# Altium PCB XEM7310_Breakout.PcbDoc (part 2 of 3)
Units mil, origin at the board's own origin, x right, y up, seen from the top; angles counter-clockwise.
Board outline 5980 x 6510 mil, 4 copper layers (Top, Ground Plane, Power Plane, Bottom), stack 61.497 mil thick; 68 components, 204 nets, 832 pads, 382 vias.
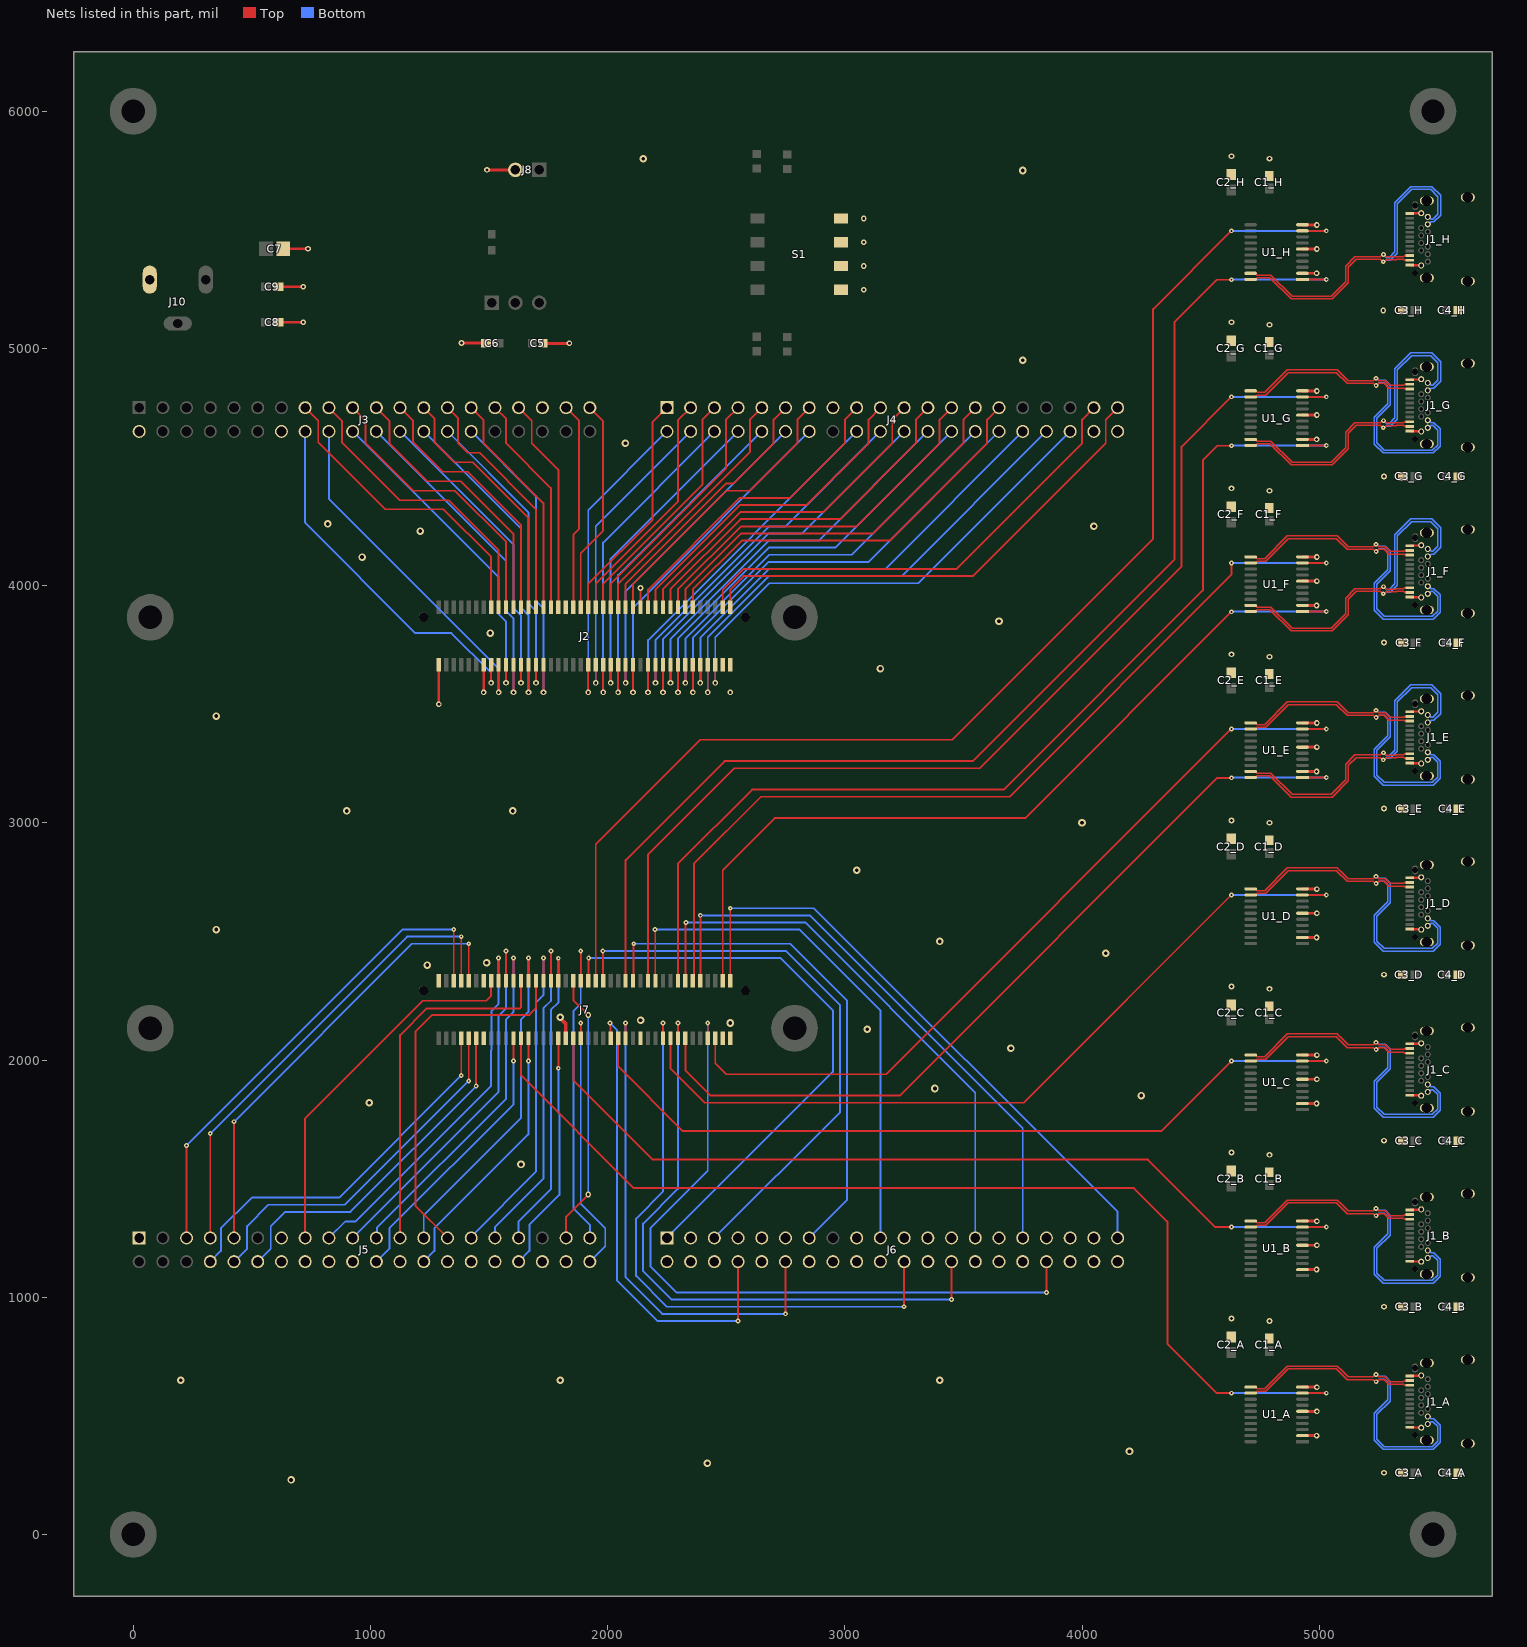
[diagram p4: the nets of this part, all layers, seen from the top]

## Via types
v1: diameter 20, hole 8, Top to Bottom, 190 vias
v2: diameter 24, hole 12, Top to Bottom, 154 vias
v3: diameter 32, hole 16, Top to Bottom, 38 vias

## Nets (pads, with @x,y where several pads share a name; then routed paths per layer and width w, separated by ;. In a path a pad name is that pad's centre, name@x,y a point inside that pad or via, vN(x,y) a via of type N, cw(c..) or ccw(c..) an arc to the next point about the centre after c; other vN are vias at no path point) (continued)
C\S\_E: J7.68 U1_E.1 | length 3536.5
  Top w8: J7.68@2327.83,2091.02 2327.83,1957.32 2435.16,1850 3230.61,1850 4570.12,3189.51 v1(4630,3189.51) ; U1_E.1@4929.27,3190.96 v1(5030,3190.96)
  Bottom w8: v1(4630,3189.51) 4630.73,3190.23 5029.27,3190.23 v1(5030,3190.96)
C\S\_E_N: J1_E.A3 J1_E.B3 U1_E.19 | length 1489
  Top w6.3: U1_E.19@4710.73,3216.55 4732.63,3216.55 4739.78,3209.4 4796.58,3209.4 4885.98,3120 5050.05,3120 5111.07,3181.02 5111.07,3246.82 5150.82,3286.57 5258.31,3286.57 5267.25,3295.5 5272.75,3295.5 5282.71,3285.55 5320.36,3285.55 5321.72,3286.91 5355.67,3286.91 5359.24,3290.47 5381.77,3290.47 J1_E.A3@5382.4,3291.1
  Bottom w6.3: v1(5270.82,3295.5) 5272.84,3295.5 5285.59,3282.75 5294.64,3282.75 5318.7,3306.81 5318.7,3514.68 5385.32,3581.3 5474.68,3581.3 5511.3,3544.68 5511.3,3460.74 5483.65,3433.09 5472.89,3433.09 5462.8,3422.99 J1_E.B3@5457.6,3422.99
C\S\_E_P: J1_E.A2 J1_E.B2 U1_E.20 | length 1449.3
  Top w6.3: U1_E.20@4710.73,3190.96 4732.63,3190.96 4739.78,3198.1 4791.9,3198.1 4881.3,3108.7 5054.73,3108.7 5122.37,3176.34 5122.37,3242.14 5155.5,3275.26 5258.31,3275.26 5268.07,3265.51 5273.57,3265.51 5282.31,3274.24 5325.04,3274.24 5326.41,3275.61 5355.67,3275.61 5359.24,3272.05 5381.77,3272.05 J1_E.A2@5382.4,3271.42
  Bottom w6.3: v1(5270,3265.51) 5273.71,3265.51 5279.65,3271.45 5299.32,3271.45 5330,3302.13 5330,3510 5390,3570 5470,3570 5500,3540 5500,3465.42 5478.97,3444.39 5472.89,3444.39 5462.8,3454.49 J1_E.B2@5457.6,3454.49
C\S\_F: J7.77 U1_F.1 | length 3563.9
  Top w8: J7.77@2485.32,2334.02 2485.32,2800.98 2704.33,3020 3760.49,3020 v1(4630,3889.51) ; U1_F.1@4929.27,3890.96 v1(5030,3890.96)
  Bottom w8: v1(4630,3889.51) 4630.73,3890.23 5029.27,3890.23 v1(5030,3890.96)
C\S\_F_N: J1_F.A3 J1_F.B3 U1_F.19 | length 1489
  Top w6.3: U1_F.19@4710.73,3916.55 4732.63,3916.55 4739.78,3909.4 4796.58,3909.4 4885.98,3820 5050.05,3820 5111.07,3881.02 5111.07,3946.82 5150.82,3986.57 5258.31,3986.57 5267.25,3995.5 5272.75,3995.5 5282.71,3985.55 5320.36,3985.55 5321.72,3986.91 5355.67,3986.91 5359.24,3990.47 5381.77,3990.47 J1_F.A3@5382.4,3991.1
  Bottom w6.3: v1(5270.82,3995.5) 5272.84,3995.5 5285.59,3982.75 5294.64,3982.75 5318.7,4006.81 5318.7,4214.68 5385.32,4281.3 5474.68,4281.3 5511.3,4244.68 5511.3,4160.74 5483.65,4133.09 5472.89,4133.09 5462.8,4122.99 J1_F.B3@5457.6,4122.99
C\S\_F_P: J1_F.A2 J1_F.B2 U1_F.20 | length 1449.3
  Top w6.3: U1_F.20@4710.73,3890.96 4732.63,3890.96 4739.78,3898.1 4791.9,3898.1 4881.3,3808.7 5054.73,3808.7 5122.37,3876.34 5122.37,3942.14 5155.5,3975.26 5258.31,3975.26 5268.07,3965.51 5273.57,3965.51 5282.31,3974.24 5325.04,3974.24 5326.41,3975.61 5355.67,3975.61 5359.24,3972.05 5381.77,3972.05 J1_F.A2@5382.4,3971.42
  Bottom w6.3: v1(5270,3965.51) 5273.71,3965.51 5279.65,3971.45 5299.32,3971.45 5330,4002.13 5330,4210 5390,4270 5470,4270 5500,4240 5500,4165.42 5478.97,4144.39 5472.89,4144.39 5462.8,4154.49 J1_F.B2@5457.6,4154.49
C\S\_G: J7.65 U1_G.1 | length 4379.3
  Top w8: J7.65@2296.34,2334.02 2296.34,2826.8 2609.54,3140 3670,3140 4510,3980 4510,4528.7 4570.81,4589.51 v1(4630,4589.51) ; U1_G.1@4929.27,4590.96 v1(5030,4590.96)
  Bottom w8: v1(4630,4589.51) 4630.73,4590.23 5029.27,4590.23 v1(5030,4590.96)
C\S\_G_N: J1_G.A3 J1_G.B3 U1_G.19 | length 1489
  Top w6.3: U1_G.19@4710.73,4616.55 4732.63,4616.55 4739.78,4609.4 4796.58,4609.4 4885.98,4520 5050.05,4520 5111.07,4581.02 5111.07,4646.82 5150.82,4686.57 5258.31,4686.57 5267.25,4695.5 5272.75,4695.5 5282.71,4685.55 5320.36,4685.55 5321.72,4686.91 5355.67,4686.91 5359.24,4690.47 5381.77,4690.47 J1_G.A3@5382.4,4691.1
  Bottom w6.3: v1(5270.82,4695.5) 5272.84,4695.5 5285.59,4682.75 5294.64,4682.75 5318.7,4706.81 5318.7,4914.68 5385.32,4981.3 5474.68,4981.3 5511.3,4944.68 5511.3,4860.74 5483.65,4833.09 5472.89,4833.09 5462.8,4822.99 J1_G.B3@5457.6,4822.99
C\S\_G_P: J1_G.A2 J1_G.B2 U1_G.20 | length 1449.3
  Top w6.3: U1_G.20@4710.73,4590.96 4732.63,4590.96 4739.78,4598.1 4791.9,4598.1 4881.3,4508.7 5054.73,4508.7 5122.37,4576.34 5122.37,4642.14 5155.5,4675.26 5258.31,4675.26 5268.07,4665.51 5273.57,4665.51 5282.31,4674.24 5325.04,4674.24 5326.41,4675.61 5355.67,4675.61 5359.24,4672.05 5381.77,4672.05 J1_G.A2@5382.4,4671.42
  Bottom w6.3: v1(5270,4665.51) 5273.71,4665.51 5279.65,4671.45 5299.32,4671.45 5330,4702.13 5330,4910 5390,4970 5470,4970 5500,4940 5500,4865.42 5478.97,4844.39 5472.89,4844.39 5462.8,4854.49 J1_G.B2@5457.6,4854.49
C\S\_H: J7.51 U1_H.1 | length 5164.1
  Top w8: J7.51@2075.87,2334.02 2075.87,2842.76 2493.11,3260 3539.58,3260 4390,4110.42 4390,5111.54 4567.97,5289.51 v1(4630,5289.51) ; U1_H.1@4929.27,5290.96 v1(5030,5290.96)
  Bottom w8: v1(4630,5289.51) 4630.73,5290.23 5029.27,5290.23 v1(5030,5290.96)
C\S\_H_N: J1_H.A3 J1_H.B3 U1_H.19 | length 1489
  Top w6.3: U1_H.19@4710.73,5316.55 4732.63,5316.55 4739.78,5309.4 4796.58,5309.4 4885.98,5220 5050.05,5220 5111.07,5281.02 5111.07,5346.82 5150.82,5386.57 5258.31,5386.57 5267.25,5395.5 5272.75,5395.5 5282.71,5385.55 5320.36,5385.55 5321.72,5386.91 5355.67,5386.91 5359.24,5390.47 5381.77,5390.47 J1_H.A3@5382.4,5391.1
  Bottom w6.3: v1(5270.82,5395.5) 5272.84,5395.5 5285.59,5382.75 5294.64,5382.75 5318.7,5406.81 5318.7,5614.68 5385.32,5681.3 5474.68,5681.3 5511.3,5644.68 5511.3,5560.74 5483.65,5533.09 5472.89,5533.09 5462.8,5522.99 J1_H.B3@5457.6,5522.99
C\S\_H_P: J1_H.A2 J1_H.B2 U1_H.20 | length 1449.3
  Top w6.3: U1_H.20@4710.73,5290.96 4732.63,5290.96 4739.78,5298.1 4791.9,5298.1 4881.3,5208.7 5054.73,5208.7 5122.37,5276.34 5122.37,5342.14 5155.5,5375.26 5258.31,5375.26 5268.07,5365.51 5273.57,5365.51 5282.31,5374.24 5325.04,5374.24 5326.41,5375.61 5355.67,5375.61 5359.24,5372.05 5381.77,5372.05 J1_H.A2@5382.4,5371.42
  Bottom w6.3: v1(5270,5365.51) 5273.71,5365.51 5279.65,5371.45 5299.32,5371.45 5330,5402.13 5330,5610 5390,5670 5470,5670 5500,5640 5500,5565.42 5478.97,5544.39 5472.89,5544.39 5462.8,5554.49 J1_H.B2@5457.6,5554.49
FPGA_TCK: J5.05 J7.05 | length 2109.4
  Top w8: J5.05@225,1250 v1(225,1640) ; J7.05@1351.46,2334.02 v1(1351.46,2550)
  Bottom w8: v1(225,1640) 1135,2550 v1(1351.46,2550)
FPGA_TDI: J5.09 J7.09 | length 1946.1
  Top w8: J5.09@425,1250 v1(425,1740) ; J7.09@1414.45,2334.02 v1(1414.45,2490)
  Bottom w8: v1(425,1740) 1175,2490 v1(1414.45,2490)
FPGA_TDO: J5.08 J7.08 | length 1594.7
  Top w8: v1(1382.95,1935.08) J7.08@1382.95,2091.02
  Bottom w8: J5.08@325,1150 370,1195 370,1290 500,1420 867.87,1420 v1(1382.95,1935.08)
FPGA_TMS: J5.07 J7.07 | length 2027.7
  Top w8: J5.07@325,1250 v1(325,1690) ; J7.07@1382.95,2334.02 v1(1382.95,2520)
  Bottom w8: v1(325,1690) 1155,2520 v1(1382.95,2520)
GND: C1_A.2 C1_B.2 C1_C.2 C1_D.2 C1_E.2 C1_F.2 C1_G.2 C1_H.2 C2_A.1 C2_B.1 C2_C.1 C2_D.1 C2_E.1 C2_F.1 C2_G.1 C2_H.1 C3_A.2 C3_B.2 C3_C.2 C3_D.2 C3_E.2 C3_F.2 C3_G.2 C3_H.2 C4_A.2 C4_B.2 C4_C.2 C4_D.2 C4_E.2 C4_F.2 C4_G.2 C4_H.2 C5.2 C6.2 C7.2 C8.2 C9.2 J1_A.1 J1_A.2 J1_A.3 J1_A.4 J1_A.A1 J1_A.A12 J1_A.B1 J1_A.B12 J1_B.1 J1_B.2 J1_B.3 J1_B.4 J1_B.A1 J1_B.A12 J1_B.B1 J1_B.B12 J1_C.1 J1_C.2 J1_C.3 J1_C.4 J1_C.A1 J1_C.A12 J1_C.B1 J1_C.B12 J1_D.1 J1_D.2 J1_D.3 J1_D.4 J1_D.A1 J1_D.A12 J1_D.B1 J1_D.B12 J1_E.1 J1_E.2 J1_E.3 J1_E.4 J1_E.A1 J1_E.A12 J1_E.B1 J1_E.B12 J1_F.1 J1_F.2 J1_F.3 J1_F.4 J1_F.A1 J1_F.A12 J1_F.B1 J1_F.B12 J1_G.1 J1_G.2 J1_G.3 J1_G.4 J1_G.A1 J1_G.A12 J1_G.B1 J1_G.B12 J1_H.1 J1_H.2 J1_H.3 J1_H.4 J1_H.A1 J1_H.A12 J1_H.B1 J1_H.B12 J2.02 J2.14 J2.35 J2.55 J2.78 J2.80 J3.02 J3.14 J3.35 J4.15 J4.38 J4.40 J5.01 J5.13 J5.14 J5.16 J5.18 J5.20 J5.24 J5.28 J5.30 J5.32 J5.36 J5.38 J6.02 J6.03 J6.04 J6.06 J6.07 J6.09 J6.10 J6.11 J6.14 J6.16 J6.17 J6.18 J6.20 J6.21 J6.23 J6.24 J6.25 J6.28 J6.29 J6.30 J6.32 J6.33 J6.35 J6.36 J6.37 J6.38 J6.40 J7.01 J7.13 J7.14 J7.36 J7.56 J7.78 J7.80 J8.2 J10.2 S1.1B S1.2B S1.3B S1.4B U1_A.2 U1_A.6 U1_A.10 U1_B.2 U1_B.6 U1_B.10 U1_C.2 U1_C.6 U1_C.10 U1_D.2 U1_D.6 U1_D.10 U1_E.2 U1_E.6 U1_E.10 U1_F.2 U1_F.6 U1_F.10 U1_G.2 U1_G.6 U1_G.10 U1_H.2 U1_H.6 U1_H.10 | length 3301.4
  Top w10: v2(1288.46,3500) J2.02@1288.46,3665.83 ; v2(1477.44,3550) J2.14@1477.44,3665.83 ; J2.55@2138.86,3908.82 v2(2138.86,3990) ; J1_A.A1@5382.4,451.73 5383.31,450.83 5428.98,450.83 J1_A.B12@5430.04,449.76 ; J1_A.A12@5382.4,668.27 5383.31,669.17 5428.98,669.17 J1_A.B1@5430.04,670.24 ; J1_B.A1@5383.31,1150.83 J1_B.B12@5428.98,1150.83 ; J1_B.A12@5383.31,1369.17 J1_B.B1@5428.98,1369.17 ; J1_C.A1@5383.31,1850.83 J1_C.B12@5428.98,1850.83 ; J1_C.A12@5383.31,2069.17 J1_C.B1@5428.98,2069.17 ; J1_D.A1@5383.31,2550.83 J1_D.B12@5428.98,2550.83 ; J1_D.A12@5383.31,2769.17 J1_D.B1@5428.98,2769.17 ; J1_E.A1@5383.31,3250.83 J1_E.B12@5428.98,3250.83 ; J1_E.A12@5383.31,3469.17 J1_E.B1@5428.98,3469.17 ; J1_F.A1@5383.31,3950.83 J1_F.B12@5428.98,3950.83 ; J1_F.A12@5383.31,4169.17 J1_F.B1@5428.98,4169.17 ; J1_G.A1@5383.31,4650.83 J1_G.B12@5428.98,4650.83 ; J1_G.A12@5383.31,4869.17 J1_G.B1@5428.98,4869.17 ; J1_H.A1@5383.31,5350.83 J1_H.B12@5428.98,5350.83 ; J1_H.A12@5383.31,5569.17 J1_H.B1@5428.98,5569.17
  Top w12: C8.2@613.31,5110 v2(716.65,5110) ; C9.2@613.31,5260 v2(716.65,5260) ; C7.2@632.9,5420 v2(736.65,5420) ; v2(1384.16,5022.51) C6.2@1487.5,5022.51 ; v2(1491.49,5752.67) J8.2@1611.49,5752.67 ; C5.2@1729.46,5020.81 1729.85,5021.2 1838.43,5021.2 v2(1838.82,5021.59) ; U1_A.2@4928.53,416.55 v2(4989.27,416.55) ; U1_B.2@4928.53,1116.55 v2(4989.27,1116.55) ; U1_C.2@4928.53,1816.55 v2(4989.27,1816.55) ; U1_D.2@4928.53,2516.55 v2(4989.27,2516.55) ; U1_E.2@4928.53,3216.55 v2(4989.27,3216.55) ; U1_F.2@4928.53,3916.55 v2(4989.27,3916.55) ; U1_G.2@4928.53,4616.55 v2(4989.27,4616.55) ; U1_H.2@4928.53,5316.55 v2(4989.27,5316.55) ; U1_A.6@4929.27,518.91 v2(4990,518.91) ; U1_A.10@4929.27,621.27 4929.54,621 4989.56,621 v2(4990,620.56) ; U1_B.6@4929.27,1218.91 v2(4990,1218.91) ; U1_B.10@4929.27,1321.27 4929.54,1321 4989.56,1321 v2(4990,1320.56) ; U1_C.6@4929.27,1918.91 v2(4990,1918.91) ; U1_C.10@4929.27,2021.27 4929.54,2021 4989.56,2021 v2(4990,2020.56) ; U1_D.6@4929.27,2618.91 v2(4990,2618.91) ; U1_D.10@4929.27,2721.27 4929.54,2721 4989.56,2721 v2(4990,2720.56) ; U1_E.6@4929.27,3318.91 v2(4990,3318.91) ; U1_E.10@4929.27,3421.27 4929.54,3421 4989.56,3421 v2(4990,3420.56) ; U1_F.6@4929.27,4018.91 v2(4990,4018.91) ; U1_F.10@4929.27,4121.27 4929.54,4121 4989.56,4121 v2(4990,4120.56) ; U1_G.6@4929.27,4718.91 v2(4990,4718.91) ; U1_G.10@4929.27,4821.27 4929.54,4821 4989.56,4821 v2(4990,4820.56) ; U1_H.6@4929.27,5418.91 v2(4990,5418.91) ; U1_H.10@4929.27,5521.27 4929.54,5521 4989.56,5521 v2(4990,5520.56)
  Top w16: v3(1800,2180) 1800,2175.67 1823.9,2151.77 J7.36@1823.9,2091.02
  other v2: 5273.17,260 4790,900 4630,910 5273.17,960 4790,1600 4630,1610 5273.17,1660 4790,2300 4630,2310 5273.17,2360 4790,3000 4630,3010 5273.17,3060 2516.81,3550 4790,3700 4630,3710 5273.17,3760 4790,4400 4630,4410 5273.17,4460 4790,5100 4630,5110 5269.86,5160 3080,5247.6 3080,5347.6 3080,5447.6 3080,5547.6 4790,5800 4630,5810
  other v3: 665.68,230 2420.58,300 4200,350 200,650 1800,650 3400,650 1635,1560 995,1820 4250,1850 3380,1880 3700,2050 3095,2130 2516.81,2156.08 2138.86,2168 1240.05,2400 1490,2410 4100,2450 3400,2500 350,2550 3050,2800 4000,3000 900,3050 1600,3050 350,3450 3150,3650 1505,3800 3650,3850 965,4120 1210,4230 4050,4250 820,4260 2075,4600 3750,4950 3750,5750 2150,5800
MC1_15: J2.15 J3.15 | length 1309.8
  Top w8: J3.15@725,4750 780,4695 780,4604.45 1062.36,4322.09 1307.99,4322.09 1508.94,4121.14 J2.15@1508.94,3908.82
MC1_16: J2.16 J3.16 | length 1549.3
  Top w8: v2(1508.94,3590) J2.16@1508.94,3665.83
  Bottom w8: J3.16@725,4650 725,4265 1190,3800 1341.46,3800 1508.94,3632.52 v2(1508.94,3590)
MC1_17: J2.17 J3.17 | length 1257.9
  Top w8: J3.17@825,4750 880,4695 880,4604.45 1124.45,4360 1330,4360 1540.43,4149.57 J2.17@1540.43,3908.82
MC1_18: J2.18 J3.18 | length 1512.2
  Top w8: v2(1540.43,3550) J2.18@1540.43,3665.83
  Bottom w8: J3.18@825,4650 825,4365.32 1540.43,3649.88 v2(1540.43,3550)
MC1_19: J2.19 J3.19 | length 1212.3
  Top w8: J3.19@925,4750 980,4695 980,4600 1180,4400 1356.06,4400 1571.93,4184.13 J2.19@1571.93,3908.82
MC1_20: J2.20 J3.20 | length 1403.8
  Top w8: v2(1571.93,3590) J2.20@1571.93,3665.83
  Bottom w8: J3.20@925,4650 1540.43,4034.57 1540.43,3879.57 1571.93,3848.07 v2(1571.93,3590)
MC1_21: J2.21 J3.21 | length 1162.8
  Top w8: J3.21@1025,4750 1080,4695 1080,4600 1240,4440 1380,4440 1603.43,4216.57 J2.21@1603.43,3908.82
MC1_22: J2.22 J3.22 | length 1455.4
  Top w8: v2(1603.43,3550) J2.22@1603.43,3665.83
  Bottom w8: J3.22@1025,4650 1571.93,4103.07 1571.93,3891.5 1603.43,3860 v2(1603.43,3550)
MC1_23: J2.23 J3.23 | length 1114.2
  Top w8: J3.23@1125,4750 1180,4695 1180,4604.45 1304.45,4480 1410,4480 1634.92,4255.08 J2.23@1634.92,3908.82
MC1_24: J2.24 J3.24 | length 1347
  Top w8: v2(1634.92,3590) J2.24@1634.92,3665.83
  Bottom w8: J3.24@1125,4650 1603.43,4171.57 1603.43,3904.61 1634.92,3873.11 v2(1634.92,3590)
MC1_25: J2.25 J3.25 | length 1069.4
  Top w8: J3.25@1225,4750 1270,4705 1270,4604.45 1354.45,4520 1431.93,4520 1666.42,4285.51 J2.25@1666.42,3908.82
MC1_26: J2.26 J3.26 | length 1398.7
  Top w8: v2(1666.42,3550) J2.26@1666.42,3665.83
  Bottom w8: J3.26@1225,4650 1634.92,4240.08 1634.92,3907.36 1666.42,3875.87 v2(1666.42,3550)
MC1_27: J2.27 J3.27 | length 1024.3
  Top w8: J3.27@1325,4750 1370,4705 1370,4601.02 1411.02,4560 1460,4560 1697.91,4322.09 J2.27@1697.91,3908.82
MC1_28: J2.28 J3.28 | length 1290.3
  Top w8: v2(1697.91,3590) J2.28@1697.91,3665.83
  Bottom w8: J3.28@1325,4650 1666.42,4308.58 1666.42,3925.2 1697.91,3893.7 v2(1697.91,3590)
MC1_29: J2.29 J3.29 | length 967.3
  Top w8: J3.29@1425,4750 1477.44,4697.56 1477.44,4600 1729.41,4348.03 J2.29@1729.41,3908.82
MC1_30: J2.30 J3.30 | length 1341.9
  Top w8: v2(1729.41,3550) J2.30@1729.41,3665.83
  Bottom w8: J3.30@1425,4650 1697.91,4377.09 1697.91,3936.1 1729.41,3904.61 v2(1729.41,3550)
MC1_31: J2.31 J3.31 | length 938.9
  Top w8: J3.31@1525,4750 1571.93,4703.07 1571.93,4600 1760.91,4411.02 J2.31@1760.91,3908.82
MC1_33: J2.33 J3.33 | length 910.5
  Top w8: J3.33@1625,4750 1680,4695 1680,4600 1792.4,4487.6 J2.33@1792.4,3908.82
MC1_37: J2.37 J3.37 | length 874.2
  Top w8: J3.37@1825,4750 1880,4695 1880,4240 1855.39,4215.39 J2.37@1855.39,3908.82
MC1_39: J2.39 J3.39 | length 902.5
  Top w8: J2.39@1886.89,3908.82 1886.89,4136.89 1980,4230 1980,4695 J3.39@1925,4750
MC1_41: J2.41 J4.01 | length 978.5
  Top w8: J2.41@1918.39,3908.82 1918.39,4007.01 2190,4278.62 2190,4690 J4.01@2250,4750
MC1_42: J2.42 J4.02 | length 1353.2
  Top w8: v2(1918.39,3550) J2.42@1918.39,3665.83
  Bottom w8: v2(1918.39,3550) 1918.39,4318.39 J4.02@2250,4650
MC1_43: J2.43 J4.03 | length 1006.9
  Top w8: J2.43@1949.88,3908.82 1949.88,4007.01 2296.34,4353.46 2296.34,4696.34 J4.03@2350,4750
MC1_44: J2.44 J4.04 | length 1301.6
  Top w8: v2(1949.88,3590) J2.44@1949.88,3665.83
  Bottom w8: v2(1949.88,3590) 1949.88,4249.88 J4.04@2350,4650
MC1_45: J2.45 J4.05 | length 1035.3
  Top w8: J2.45@1981.38,3908.82 1981.38,4007.01 2400,4425.63 2400,4700 J4.05@2450,4750
MC1_46: J2.46 J4.06 | length 1409.9
  Top w8: v2(1981.38,3550) J2.46@1981.38,3665.83
  Bottom w8: v2(1981.38,3550) 1981.38,4181.38 J4.06@2450,4650
MC1_47: J2.47 J4.07 | length 1063.7
  Top w8: J2.47@2012.87,3908.82 2012.87,4007.36 2498.86,4493.35 2498.86,4698.86 J4.07@2550,4750
MC1_48: J2.48 J4.08 | length 1358.3
  Top w8: v2(2012.87,3590) J2.48@2012.87,3665.83
  Bottom w8: v2(2012.87,3590) 2012.87,4112.87 J4.08@2550,4650
MC1_49: J2.49 J4.09 | length 1092
  Top w8: J2.49@2044.37,3908.82 2044.37,4007.01 2600,4562.64 2600,4700 J4.09@2650,4750
MC1_50: J2.50 J4.10 | length 1466.7
  Top w8: v2(2044.37,3550) J2.50@2044.37,3665.83
  Bottom w8: v2(2044.37,3550) 2044.37,4044.37 J4.10@2650,4650
MC1_51: J2.51 J4.11 | length 1138.7
  Top w8: J2.51@2075.87,3908.82 2075.87,4007.01 2498.86,4430 2530,4430 2700,4600 2700,4700 J4.11@2750,4750
MC1_52: J2.52 J4.12 | length 1415.1
  Top w8: v2(2075.87,3590) J2.52@2075.87,3665.83
  Bottom w8: v2(2075.87,3590) 2075.87,3975.87 J4.12@2750,4650
MC1_53: J2.53 J4.13 | length 1207.4
  Top w8: J2.53@2107.36,3908.82 2107.36,4007.36 2500,4400 2600,4400 2800,4600 2800,4700 J4.13@2850,4750
MC1_54: J2.54 J4.14 | length 1523.4
  Top w8: v2(2107.36,3550) J2.54@2107.36,3665.83
  Bottom w8: v2(2107.36,3550) 2107.36,3907.36 J4.14@2850,4650
MC1_57: J2.57 J4.17 | length 1330.4
  Top w8: J2.57@2170.35,3908.82 2170.35,3983.51 2556.85,4370 2770,4370 3000,4600 3000,4700 J4.17@3050,4750
MC1_58: J2.58 J4.18 | length 1580.2
  Top w8: v2(2170.35,3550) J2.58@2170.35,3665.83
  Bottom w8: v2(2170.35,3550) 2170.35,3770.35 J4.18@3050,4650
MC1_59: J2.59 J4.19 | length 1398.9
  Top w8: J2.59@2201.85,3908.82 2201.85,3983.51 2558.34,4340 2840,4340 3100,4600 3100,4700 J4.19@3150,4750
MC1_60: J2.60 J4.20 | length 1568.7
  Top w8: v2(2201.85,3590) J2.60@2201.85,3665.83
  Bottom w8: v2(2201.85,3590) 2201.85,3770.29 2681.56,4250 2750,4250 J4.20@3150,4650
MC1_61: J2.61 J4.21 | length 1467.6
  Top w8: J2.61@2233.35,3908.82 2233.35,3983.82 2559.53,4310 2910,4310 3200,4600 3200,4700 J4.21@3250,4750
MC1_62: J2.62 J4.22 | length 1718.9
  Top w8: v2(2233.35,3550) J2.62@2233.35,3665.83
  Bottom w8: v2(2233.35,3550) 2233.35,3773.35 2680,4220 2820,4220 J4.22@3250,4650
MC1_63: J2.63 J4.23 | length 1536.1
  Top w8: J2.63@2264.84,3908.82 2264.84,3983.82 2561.02,4280 2980,4280 3300,4600 3300,4700 J4.23@3350,4750
MC1_64: J2.64 J4.24 | length 1708.3
  Top w8: v2(2264.84,3590) J2.64@2264.84,3665.83
  Bottom w8: v2(2264.84,3590) 2264.84,3774.84 2680,4190 2890,4190 J4.24@3350,4650
MC1_65: J2.65 J4.25 | length 1604.6
  Top w8: J2.65@2296.34,3908.82 2296.34,3983.82 2562.52,4250 3050,4250 3400,4600 3400,4700 J4.25@3450,4750
MC1_66: J2.66 J4.26 | length 1857.7
  Top w8: v2(2296.34,3550) J2.66@2296.34,3665.83
  Bottom w8: v2(2296.34,3550) 2296.34,3776.34 2680,4160 2960,4160 J4.26@3450,4650
MC1_67: J2.67 J4.27 | length 1673.1
  Top w8: J2.67@2327.83,3908.82 2327.83,3983.82 2564.02,4220 3120,4220 3500,4600 3500,4700 J4.27@3550,4750
MC1_68: J2.68 J4.28 | length 1846.3
  Top w8: v2(2327.83,3590) J2.68@2327.83,3665.83
  Bottom w8: v2(2327.83,3590) 2327.83,3776.5 2681.33,4130 3030,4130 J4.28@3550,4650
MC1_69: J2.69 J4.29 | length 1741.6
  Top w8: J2.69@2359.33,3908.82 2359.33,3983.82 2565.51,4190 3190,4190 3600,4600 3600,4700 J4.29@3650,4750
MC1_70: J2.70 J4.30 | length 1996.5
  Top w8: v2(2359.33,3550) J2.70@2359.33,3665.83
  Bottom w8: v2(2359.33,3550) 2359.33,3779.33 2680,4100 3100,4100 J4.30@3650,4650
MC1_72: J2.72 J4.32 | length 1985.8
  Top w8: v2(2390.83,3590) J2.72@2390.83,3665.83
  Bottom w8: v2(2390.83,3590) 2390.83,3780.83 2680,4070 3170,4070 J4.32@3750,4650
MC1_74: J2.74 J4.34 | length 2135.2
  Top w8: v2(2422.32,3550) J2.74@2422.32,3665.83
  Bottom w8: v2(2422.32,3550) 2422.32,3782.32 2680,4040 3240,4040 J4.34@3850,4650
MC1_76: J2.76 J4.36 | length 2123.7
  Top w8: v2(2453.82,3590) J2.76@2453.82,3665.83
  Bottom w8: v2(2453.82,3590) 2453.82,3782.26 2681.56,4010 3310,4010 J4.36@3950,4650
MC1_77: J2.77 J4.37 | length 2015.4
  Top w8: J2.77@2485.32,3908.82 2485.32,3983.51 2571.81,4070 3470,4070 4000,4600 4000,4700 J4.37@4050,4750
MC1_79: J2.79 J4.39 | length 2083.9
  Top w8: J2.79@2516.81,3908.82 2516.81,3983.51 2573.3,4040 3540,4040 4100,4600 4100,4700 J4.39@4150,4750
MC2_10: J5.10 J7.10 | length 1540
  Top w8: v1(1414.45,1911.61) J7.10@1414.45,2091.02
  Bottom w8: J5.10@425,1150 480,1205 480,1300 570,1390 892.83,1390 v1(1414.45,1911.61)
MC2_12: J5.12 J7.12 | length 1484.1
  Top w8: v1(1445.95,1890) J7.12@1445.95,2091.02
  Bottom w8: J5.12@525,1150 580,1205 580,1300 640,1360 915.95,1360 v1(1445.95,1890)
MC2_15: J5.15 J7.15 | length 1565.2
  Top w8: J5.15@725,1250 725,1754.65 1220.35,2250 1487.44,2250 1508.94,2271.5 J7.15@1508.94,2334.02
MC2_17: J5.17 J7.17 | length 1597.2
  Top w8: J7.17@1540.43,2334.02 v1(1540.43,2430)
  Bottom w8: J5.17@825,1250 895,1320 937.44,1320 1508.94,1891.5 1508.94,2040 1510,2041.06 1510,2206.46 1540.43,2236.89 v1(1540.43,2430)
MC2_19: J5.19 J7.19 | length 1603.5
  Top w8: J7.19@1571.93,2334.02 v1(1571.93,2459.78)
  Bottom w8: J5.19@925,1250 1540.43,1865.43 1540.43,2185.83 1571.93,2217.32 v1(1571.93,2459.78)
MC2_21: J5.21 J7.21 | length 1515.6
  Top w8: J7.21@1603.43,2334.02 v1(1603.43,2430)
  Bottom w8: J5.21@1025,1250 1027.76,1252.76 1027.76,1292.36 1571.93,1836.54 1571.93,2171.93 1603.43,2203.43 v1(1603.43,2430)
MC2_22: J5.22 J7.22 | length 1180.6
  Top w8: v1(1603.43,1995.85) J7.22@1603.43,2091.02
  Bottom w8: J5.22@1025,1150 1080,1205 1080,1290 1603.43,1813.43 v1(1603.43,1995.85)
MC2_23: J5.23 J7.23 | length 1525
  Top w8: J5.23@1125,1250 1125,2105 1237.91,2217.91 1630.24,2217.91 1634.92,2222.6 J7.23@1634.92,2334.02
MC2_25: J5.25 J7.25 | length 1458.8
  Top w8: J7.25@1666.42,2334.02 v1(1666.42,2430)
  Bottom w8: J5.25@1225,1250 1225,1346.54 1634.92,1756.46 1634.92,2171.12 1666.42,2202.62 v1(1666.42,2430)
MC2_27: J5.27 J7.27 | length 1590.5
  Top w8: J5.27@1325,1250 1190,1385 1190,2120 1260,2190 1670,2190 1697.91,2217.91 J7.27@1697.91,2334.02
MC2_29: J5.29 J7.29 | length 1402.1
  Top w8: J7.29@1729.41,2334.02 v1(1729.41,2430)
  Bottom w8: J5.29@1425,1250 1425,1255.91 1697.91,1528.82 1697.91,2242.4 1729.41,2273.9 v1(1729.41,2430)
MC2_31: J5.31 J7.31 | length 1433.3
  Top w8: J7.31@1760.91,2334.02 v1(1760.91,2459.78)
  Bottom w8: J5.31@1525,1250 1525,1295 1729.41,1499.41 1729.41,2217.32 1760.91,2248.82 v1(1760.91,2459.78)
MC2_33: J5.33 J7.33 | length 1343.7
  Top w8: J7.33@1792.4,2334.02 v1(1792.4,2429.19)
  Bottom w8: J5.33@1625,1250 1625,1320 1760.91,1455.91 1760.91,2210.91 1792.4,2242.4 v1(1792.4,2429.19)
MC2_34: J5.34 J7.34 | length 1013.8
  Top w8: v1(1792.4,1965.16) J7.34@1792.4,2091.02
  Bottom w8: J5.34@1625,1150 1670,1195 1670,1304.61 1796.54,1431.14 1796.54,1772.97 1792.4,1777.11 v1(1792.4,1965.16)
MC2_37: J5.37 J7.37 | length 1148.8
  Top w8: J5.37@1825,1250 1825,1339.61 v2(1918.39,1432.99) ; J7.37@1855.39,2334.02 1855.39,2252.99 v2(1918.39,2190)
  Bottom w8: v2(1918.39,1432.99) v2(1918.39,2190)
MC2_39: J5.39 J7.39 | length 1377.9
  Top w8: J7.39@1886.89,2334.02 v1(1886.89,2460)
  Bottom w8: v1(1886.89,2460) 1886.89,2236.89 1855.39,2205.39 1855.39,1374.61 1925,1305 J5.39@1925,1250
MC2_45: J6.05 J7.45 | length 2421.4
  Top w8: v1(1980,2460) 1980.69,2459.31 1980.69,2334.71 J7.45@1981.38,2334.02
  Bottom w8: v1(1980,2460) 2750,2460 2980,2230 2980,1780 J6.05@2450,1250
MC2_48: J6.08 J7.48 | length 1995.2
  Top w8: v1(2010,2156.08) 2011.44,2154.65 2011.44,2092.46 J7.48@2012.87,2091.02 ; v1(2550,900) J6.08@2550,1150
  Bottom w8: v1(2010,2156.08) 2040,2126.08 2040,1070 2210,900 v1(2550,900)
MC2_59: J6.19 J7.59 | length 2267.6
  Top w8: v1(2200,2550) 2200.93,2549.07 2200.93,2334.94 J7.59@2201.85,2334.02
  Bottom w8: v1(2200,2550) 2810,2550 3150,2210 J6.19@3150,1250
MC2_62: J6.22 J7.62 | length 2551.9
  Top w8: J7.62@2233.35,2091.02 v1(2233.35,2156.08) ; v1(3250,960) J6.22@3250,1150
  Bottom w8: v1(2233.35,2156.08) 2233.35,1444.49 2120,1331.14 2120,1090 2250,960 v1(3250,960)
MC2_71: J6.31 J7.71 | length 2469.4
  Top w8: J7.71@2390.83,2334.02 v1(2390.83,2610)
  Bottom w8: v1(2390.83,2610) 2852.52,2610 3750,1712.52 J6.31@3750,1250
MC2_74: J6.34 J7.74 | length 3037.1
  Top w8: J7.74@2422.32,2091.02 v1(2422.32,2156.08) ; v1(3850,1020) J6.34@3850,1150
  Bottom w8: v1(2422.32,2156.08) 2422.32,1532.32 2180,1290 2180,1130 2290,1020 v1(3850,1020)
MISO_A1: J7.24 U1_A.9 | length 4507.8
  Top w8: J7.24@1634.92,2091.02 1634.92,1935.08 2110,1460 4218.71,1460 4360,1318.71 4360,804.38 4568.69,595.68 v1(4630,595.68) ; U1_A.9@4929.27,595.68 v1(5030,595.68)
  Bottom w8: v1(4630,595.68) v1(5030,595.68)
MISO_A2: J5.26 J7.26 | length 1123.9
  Top w8: v1(1666.42,1995.85) J7.26@1666.42,2091.02
  Bottom w8: J5.26@1225,1150 1270,1195 1270,1290 1666.42,1686.42 v1(1666.42,1995.85)
MISO_A_N: J1_A.A11 J1_A.B11 U1_A.11 | length 1487.1
  Top w6.3: U1_A.11@4710.73,621.27 4732.63,621.27 4739.78,614.13 4770.19,614.13 4865.79,709.72 5076.69,709.72 5083.31,703.1 5087.99,698.42 5122.41,664 5227.47,664 5237.86,674.39 v1(5239.46,674.39) ; v1@5240,672.39 5243.17,672.39 5251.51,664.04 5278.65,664.04 5298.3,644.39 5355.67,644.39 5359.24,647.95 5381.77,647.95 J1_A.A11@5382.4,648.58
  Bottom w6.3: v1(5239.46,674.39) 5241.17,674.39 v1@5243.17,672.39 ; v1@5239.48,673.09 5244.04,673.09 5251.34,665.79 5278.1,665.79 5299.5,644.39 5299.5,562.26 5243.17,505.92 5243.17,401.52 5274.16,370.53 5476.6,370.53 5498.7,392.63 5498.7,455.88 5478.97,475.61 5472.89,475.61 5462.8,465.51 J1_A.B11@5457.6,465.51
MISO_A_P: J1_A.A10 J1_A.B10 U1_A.12 | length 1520.6
  Top w6.3: U1_A.12@4710.73,595.68 4732.63,595.68 4739.78,602.83 4774.87,602.83 4870.47,698.42 5072.01,698.42 5117.73,652.7 5228.41,652.7 5237.21,643.9 v1(5240.11,643.9) ; v1@5240.2,644.39 5243.17,644.39 5251.51,652.74 5273.96,652.74 5293.62,633.09 5355.67,633.09 5359.24,629.53 5381.77,629.53 J1_A.A10@5382.4,628.9
  Bottom w6.3: v1(5240.11,643.9) 5241.71,643.9 5252.3,654.49 5273.42,654.49 5288.2,639.71 5288.2,566.94 5231.86,510.6 5231.86,396.84 5269.47,359.23 5481.28,359.23 5510,387.95 5510,460.56 5483.65,486.91 5472.89,486.91 5462.8,497.01 J1_A.B10@5457.6,497.01
MISO_B1: J7.38 U1_B.9 | length 3708.1
  Top w8: J7.38@1855.39,2091.02 1855.39,1914.61 2190,1580 4277.8,1580 4562.12,1295.68 v1(4630,1295.68) ; U1_B.9@4929.27,1295.68 v1(5030,1295.68)
  Bottom w8: v1(4630,1295.68) v1(5030,1295.68)
MISO_B2: J5.40 J7.40 | length 1140.8
  Top w8: J7.40@1886.89,2091.02 v1(1886.89,2156.08)
  Bottom w8: v1(1886.89,2156.08) 1886.89,1393.11 1990,1290 1990,1215 J5.40@1925,1150
MISO_B_N: J1_B.A11 J1_B.B11 U1_B.11 | length 1487.1
  Top w6.3: U1_B.11@4710.73,1321.27 4732.63,1321.27 4739.78,1314.13 4770.19,1314.13 4865.79,1409.72 5076.69,1409.72 5083.31,1403.1 5087.99,1398.42 5122.41,1364 5227.47,1364 5237.86,1374.39 v1(5239.46,1374.39) ; v1@5240,1372.39 5243.17,1372.39 5251.51,1364.04 5278.65,1364.04 5298.3,1344.39 5355.67,1344.39 5359.24,1347.95 5381.77,1347.95 J1_B.A11@5382.4,1348.58
  Bottom w6.3: v1(5239.46,1374.39) 5241.17,1374.39 v1@5243.17,1372.39 ; v1@5239.48,1373.09 5244.04,1373.09 5251.34,1365.79 5278.1,1365.79 5299.5,1344.39 5299.5,1262.26 5243.17,1205.92 5243.17,1101.52 5274.16,1070.53 5476.6,1070.53 5498.7,1092.63 5498.7,1155.88 5478.97,1175.61 5472.89,1175.61 5462.8,1165.51 J1_B.B11@5457.6,1165.51
MISO_B_P: J1_B.A10 J1_B.B10 U1_B.12 | length 1520.6
  Top w6.3: U1_B.12@4710.73,1295.68 4732.63,1295.68 4739.78,1302.83 4774.87,1302.83 4870.47,1398.42 5072.01,1398.42 5117.73,1352.7 5228.41,1352.7 5237.21,1343.9 v1(5240.11,1343.9) ; v1@5240.2,1344.39 5243.17,1344.39 5251.51,1352.74 5273.96,1352.74 5293.62,1333.09 5355.67,1333.09 5359.24,1329.53 5381.77,1329.53 J1_B.A10@5382.4,1328.9
  Bottom w6.3: v1(5240.11,1343.9) 5241.71,1343.9 5252.3,1354.49 5273.42,1354.49 5288.2,1339.71 5288.2,1266.94 5231.86,1210.6 5231.86,1096.84 5269.47,1059.23 5481.28,1059.23 5510,1087.95 5510,1160.56 5483.65,1186.91 5472.89,1186.91 5462.8,1197.01 J1_B.B10@5457.6,1197.01
MISO_C1: J7.50 U1_C.9 | length 3439.9
  Top w8: J7.50@2044.37,2091.02 2044.37,1972.99 2317.36,1700 4334.32,1700 v1(4630,1995.68) ; U1_C.9@4929.27,1995.68 v1(5030,1995.68)
  Bottom w8: v1(4630,1995.68) v1(5030,1995.68)
MISO_C2: J6.12 J7.52 | length 2095
  Top w8: J7.52@2075.87,2091.02 v1(2075.87,2156.08) ; v1(2750,930) J6.12@2750,1150
  Bottom w8: v1(2075.87,2156.08) 2075.87,1084.13 2230,930 v1(2750,930)
MISO_C_N: J1_C.A11 J1_C.B11 U1_C.11 | length 1487.1
  Top w6.3: U1_C.11@4710.73,2021.27 4732.63,2021.27 4739.78,2014.13 4770.19,2014.13 4865.79,2109.72 5076.69,2109.72 5083.31,2103.1 5087.99,2098.42 5122.41,2064 5227.47,2064 5237.86,2074.39 v1(5239.46,2074.39) ; v1@5240,2072.39 5243.17,2072.39 5251.51,2064.04 5278.65,2064.04 5298.3,2044.39 5355.67,2044.39 5359.24,2047.95 5381.77,2047.95 J1_C.A11@5382.4,2048.58
  Bottom w6.3: v1(5239.46,2074.39) 5241.17,2074.39 v1@5243.17,2072.39 ; v1@5239.48,2073.09 5244.04,2073.09 5251.34,2065.79 5278.1,2065.79 5299.5,2044.39 5299.5,1962.26 5243.17,1905.92 5243.17,1801.52 5274.16,1770.53 5476.6,1770.53 5498.7,1792.63 5498.7,1855.88 5478.97,1875.61 5472.89,1875.61 5462.8,1865.51 J1_C.B11@5457.6,1865.51
MISO_C_P: J1_C.A10 J1_C.B10 U1_C.12 | length 1520.6
  Top w6.3: U1_C.12@4710.73,1995.68 4732.63,1995.68 4739.78,2002.83 4774.87,2002.83 4870.47,2098.42 5072.01,2098.42 5117.73,2052.7 5228.41,2052.7 5237.21,2043.9 v1(5240.11,2043.9) ; v1@5240.2,2044.39 5243.17,2044.39 5251.51,2052.74 5273.96,2052.74 5293.62,2033.09 5355.67,2033.09 5359.24,2029.53 5381.77,2029.53 J1_C.A10@5382.4,2028.9
  Bottom w6.3: v1(5240.11,2043.9) 5241.71,2043.9 5252.3,2054.49 5273.42,2054.49 5288.2,2039.71 5288.2,1966.94 5231.86,1910.6 5231.86,1796.84 5269.47,1759.23 5481.28,1759.23 5510,1787.95 5510,1860.56 5483.65,1886.91 5472.89,1886.91 5462.8,1897.01 J1_C.B10@5457.6,1897.01
MISO_D1: J7.64 U1_D.9 | length 3414.6
  Top w8: J7.64@2264.84,2091.02 2264.84,1965.16 2410,1820 3754.32,1820 v1(4630,2695.68) ; U1_D.9@4929.27,2695.68 v1(5030,2695.68)
  Bottom w8: v1(4630,2695.68) v1(5030,2695.68)
MISO_D2: J6.26 J7.66 | length 2681.5
  Top w8: J7.66@2296.34,2091.02 v1(2296.34,2156.08) ; v1(3450,990) J6.26@3450,1150
  Bottom w8: v1(2296.34,2156.08) 2296.34,1456.34 2150,1310 2150,1110 2270,990 v1(3450,990)
MISO_D_N: J1_D.A11 J1_D.B11 U1_D.11 | length 1487.1
  Top w6.3: U1_D.11@4710.73,2721.27 4732.63,2721.27 4739.78,2714.13 4770.19,2714.13 4865.79,2809.72 5076.69,2809.72 5083.31,2803.1 5087.99,2798.42 5122.41,2764 5227.47,2764 5237.86,2774.39 v1(5239.46,2774.39) ; v1@5240,2772.39 5243.17,2772.39 5251.51,2764.04 5278.65,2764.04 5298.3,2744.39 5355.67,2744.39 5359.24,2747.95 5381.77,2747.95 J1_D.A11@5382.4,2748.58
  Bottom w6.3: v1(5239.46,2774.39) 5241.17,2774.39 v1@5243.17,2772.39 ; v1@5239.48,2773.09 5244.04,2773.09 5251.34,2765.79 5278.1,2765.79 5299.5,2744.39 5299.5,2662.26 5243.17,2605.92 5243.17,2501.52 5274.16,2470.53 5476.6,2470.53 5498.7,2492.63 5498.7,2555.88 5478.97,2575.61 5472.89,2575.61 5462.8,2565.51 J1_D.B11@5457.6,2565.51
MISO_D_P: J1_D.A10 J1_D.B10 U1_D.12 | length 1520.6
  Top w6.3: U1_D.12@4710.73,2695.68 4732.63,2695.68 4739.78,2702.83 4774.87,2702.83 4870.47,2798.42 5072.01,2798.42 5117.73,2752.7 5228.41,2752.7 5237.21,2743.9 v1(5240.11,2743.9) ; v1@5240.2,2744.39 5243.17,2744.39 5251.51,2752.74 5273.96,2752.74 5293.62,2733.09 5355.67,2733.09 5359.24,2729.53 5381.77,2729.53 J1_D.A10@5382.4,2728.9
  Bottom w6.3: v1(5240.11,2743.9) 5241.71,2743.9 5252.3,2754.49 5273.42,2754.49 5288.2,2739.71 5288.2,2666.94 5231.86,2610.6 5231.86,2496.84 5269.47,2459.23 5481.28,2459.23 5510,2487.95 5510,2560.56 5483.65,2586.91 5472.89,2586.91 5462.8,2597.01 J1_D.B10@5457.6,2597.01
MISO_E1: J7.76 U1_E.9 | length 3403.8
  Top w8: J7.76@2453.82,2091.02 2453.82,1986.18 2500,1940 3174.32,1940 v1(4630,3395.68) ; U1_E.9@4929.27,3395.68 v1(5030,3395.68)
  Bottom w8: v1(4630,3395.68) v1(5030,3395.68)
MISO_E2: J6.39 J7.79 | length 2579.4
  Top w8: J7.79@2516.81,2334.02 v1(2516.81,2640)
  Bottom w8: v1(2516.81,2640) 2870,2640 4150,1360 J6.39@4150,1250
MISO_E_N: J1_E.A11 J1_E.B11 U1_E.11 | length 1487.1
  Top w6.3: U1_E.11@4710.73,3421.27 4732.63,3421.27 4739.78,3414.13 4770.19,3414.13 4865.79,3509.72 5076.69,3509.72 5083.31,3503.1 5087.99,3498.42 5122.41,3464 5227.47,3464 5237.86,3474.39 v1(5239.46,3474.39) ; v1@5240,3472.39 5243.17,3472.39 5251.51,3464.04 5278.65,3464.04 5298.3,3444.39 5355.67,3444.39 5359.24,3447.95 5381.77,3447.95 J1_E.A11@5382.4,3448.58
  Bottom w6.3: v1(5239.46,3474.39) 5241.17,3474.39 v1@5243.17,3472.39 ; v1@5239.48,3473.09 5244.04,3473.09 5251.34,3465.79 5278.1,3465.79 5299.5,3444.39 5299.5,3362.26 5243.17,3305.92 5243.17,3201.52 5274.16,3170.53 5476.6,3170.53 5498.7,3192.63 5498.7,3255.88 5478.97,3275.61 5472.89,3275.61 5462.8,3265.51 J1_E.B11@5457.6,3265.51
MISO_E_P: J1_E.A10 J1_E.B10 U1_E.12 | length 1520.6
  Top w6.3: U1_E.12@4710.73,3395.68 4732.63,3395.68 4739.78,3402.83 4774.87,3402.83 4870.47,3498.42 5072.01,3498.42 5117.73,3452.7 5228.41,3452.7 5237.21,3443.9 v1(5240.11,3443.9) ; v1@5240.2,3444.39 5243.17,3444.39 5251.51,3452.74 5273.96,3452.74 5293.62,3433.09 5355.67,3433.09 5359.24,3429.53 5381.77,3429.53 J1_E.A10@5382.4,3428.9
  Bottom w6.3: v1(5240.11,3443.9) 5241.71,3443.9 5252.3,3454.49 5273.42,3454.49 5288.2,3439.71 5288.2,3366.94 5231.86,3310.6 5231.86,3196.84 5269.47,3159.23 5481.28,3159.23 5510,3187.95 5510,3260.56 5483.65,3286.91 5472.89,3286.91 5462.8,3297.01 J1_E.B10@5457.6,3297.01
MISO_F1: J7.69 U1_F.9 | length 3816.7
  Top w8: J7.69@2359.33,2334.02 2363.45,2338.14 2363.45,2826.8 2646.65,3110 3694.39,3110 4630,4045.61 v1(4630,4095.68) ; U1_F.9@4929.27,4095.68 v1(5030,4095.68)
  Bottom w8: v1(4630,4095.68) v1(5030,4095.68)
MISO_F2: J6.27 J7.67 | length 2376.6
  Top w8: J7.67@2327.83,2334.02 2328.92,2335.1 2328.92,2578.92 v1(2330,2580)
  Bottom w8: v1(2330,2580) 2832.52,2580 3550,1862.52 J6.27@3550,1250
MISO_F_N: J1_F.A11 J1_F.B11 U1_F.11 | length 1487.1
  Top w6.3: U1_F.11@4710.73,4121.27 4732.63,4121.27 4739.78,4114.13 4770.19,4114.13 4865.79,4209.72 5076.69,4209.72 5083.31,4203.1 5087.99,4198.42 5122.41,4164 5227.47,4164 5237.86,4174.39 v1(5239.46,4174.39) ; v1@5240,4172.39 5243.17,4172.39 5251.51,4164.04 5278.65,4164.04 5298.3,4144.39 5355.67,4144.39 5359.24,4147.95 5381.77,4147.95 J1_F.A11@5382.4,4148.58
  Bottom w6.3: v1(5239.46,4174.39) 5241.17,4174.39 v1@5243.17,4172.39 ; v1@5239.48,4173.09 5244.04,4173.09 5251.34,4165.79 5278.1,4165.79 5299.5,4144.39 5299.5,4062.26 5243.17,4005.92 5243.17,3901.52 5274.16,3870.53 5476.6,3870.53 5498.7,3892.63 5498.7,3955.88 5478.97,3975.61 5472.89,3975.61 5462.8,3965.51 J1_F.B11@5457.6,3965.51
MISO_F_P: J1_F.A10 J1_F.B10 U1_F.12 | length 1520.6
  Top w6.3: U1_F.12@4710.73,4095.68 4732.63,4095.68 4739.78,4102.83 4774.87,4102.83 4870.47,4198.42 5072.01,4198.42 5117.73,4152.7 5228.41,4152.7 5237.21,4143.9 v1(5240.11,4143.9) ; v1@5240.2,4144.39 5243.17,4144.39 5251.51,4152.74 5273.96,4152.74 5293.62,4133.09 5355.67,4133.09 5359.24,4129.53 5381.77,4129.53 J1_F.A10@5382.4,4128.9
  Bottom w6.3: v1(5240.11,4143.9) 5241.71,4143.9 5252.3,4154.49 5273.42,4154.49 5288.2,4139.71 5288.2,4066.94 5231.86,4010.6 5231.86,3896.84 5269.47,3859.23 5481.28,3859.23 5510,3887.95 5510,3960.56 5483.65,3986.91 5472.89,3986.91 5462.8,3997.01 J1_F.B10@5457.6,3997.01
MISO_G1: J7.57 U1_G.9 | length 4587.5
  Top w8: J7.57@2170.35,2334.02 2170.35,2867.24 2533.11,3230 3568.11,3230 4420,4081.89 4420,4585.68 v1(4630,4795.68) ; U1_G.9@4929.27,4795.68 v1(5030,4795.68)
  Bottom w8: v1(4630,4795.68) v1(5030,4795.68)
MISO_G2: J6.13 J7.53 | length 2222.8
  Top w8: J7.53@2107.36,2334.02 2108.68,2335.33 2108.68,2488.68 v1(2110,2490)
  Bottom w8: v1(2110,2490) 2770,2490 3010,2250 3010,1410 J6.13@2850,1250
MISO_G_N: J1_G.A11 J1_G.B11 U1_G.11 | length 1487.1
  Top w6.3: U1_G.11@4710.73,4821.27 4732.63,4821.27 4739.78,4814.13 4770.19,4814.13 4865.79,4909.72 5076.69,4909.72 5083.31,4903.1 5087.99,4898.42 5122.41,4864 5227.47,4864 5237.86,4874.39 v1(5239.46,4874.39) ; v1@5240,4872.39 5243.17,4872.39 5251.51,4864.04 5278.65,4864.04 5298.3,4844.39 5355.67,4844.39 5359.24,4847.95 5381.77,4847.95 J1_G.A11@5382.4,4848.58
  Bottom w6.3: v1(5239.46,4874.39) 5241.17,4874.39 v1@5243.17,4872.39 ; v1@5239.48,4873.09 5244.04,4873.09 5251.34,4865.79 5278.1,4865.79 5299.5,4844.39 5299.5,4762.26 5243.17,4705.92 5243.17,4601.52 5274.16,4570.53 5476.6,4570.53 5498.7,4592.63 5498.7,4655.88 5478.97,4675.61 5472.89,4675.61 5462.8,4665.51 J1_G.B11@5457.6,4665.51
MISO_G_P: J1_G.A10 J1_G.B10 U1_G.12 | length 1520.6
  Top w6.3: U1_G.12@4710.73,4795.68 4732.63,4795.68 4739.78,4802.83 4774.87,4802.83 4870.47,4898.42 5072.01,4898.42 5117.73,4852.7 5228.41,4852.7 5237.21,4843.9 v1(5240.11,4843.9) ; v1@5240.2,4844.39 5243.17,4844.39 5251.51,4852.74 5273.96,4852.74 5293.62,4833.09 5355.67,4833.09 5359.24,4829.53 5381.77,4829.53 J1_G.A10@5382.4,4828.9
  Bottom w6.3: v1(5240.11,4843.9) 5241.71,4843.9 5252.3,4854.49 5273.42,4854.49 5288.2,4839.71 5288.2,4766.94 5231.86,4710.6 5231.86,4596.84 5269.47,4559.23 5481.28,4559.23 5510,4587.95 5510,4660.56 5483.65,4686.91 5472.89,4686.91 5462.8,4697.01 J1_G.B10@5457.6,4697.01
MISO_H1: J7.43 U1_H.9 | length 5394.9
  Top w8: J7.43@1949.88,2334.02 1949.88,2909.88 2390,3350 3452.38,3350 4300,4197.62 4300,5165.68 v1(4630,5495.68) ; U1_H.9@4929.27,5495.68 v1(5030,5495.68)
  Bottom w8: v1(4630,5495.68) v1(5030,5495.68)
MISO_H2: J6.01 J7.41 | length 2467.7
  Top w8: J7.41@1918.39,2334.02 1919.19,2334.82 1919.19,2429.19 v1(1920,2430)
  Bottom w8: v1(1920,2430) 2730,2430 2950,2210 2950,1950 J6.01@2250,1250